# Altium PCB vspyshka.PcbDoc
Units mm, origin at the board's own origin, x right, y up, seen from the top; angles counter-clockwise.
Board outline 53 x 53 mm, 2 copper layers (Top Layer, Bottom Layer), stack 0.891 mm thick; 32 components, 18 nets, 79 pads, 102 vias.
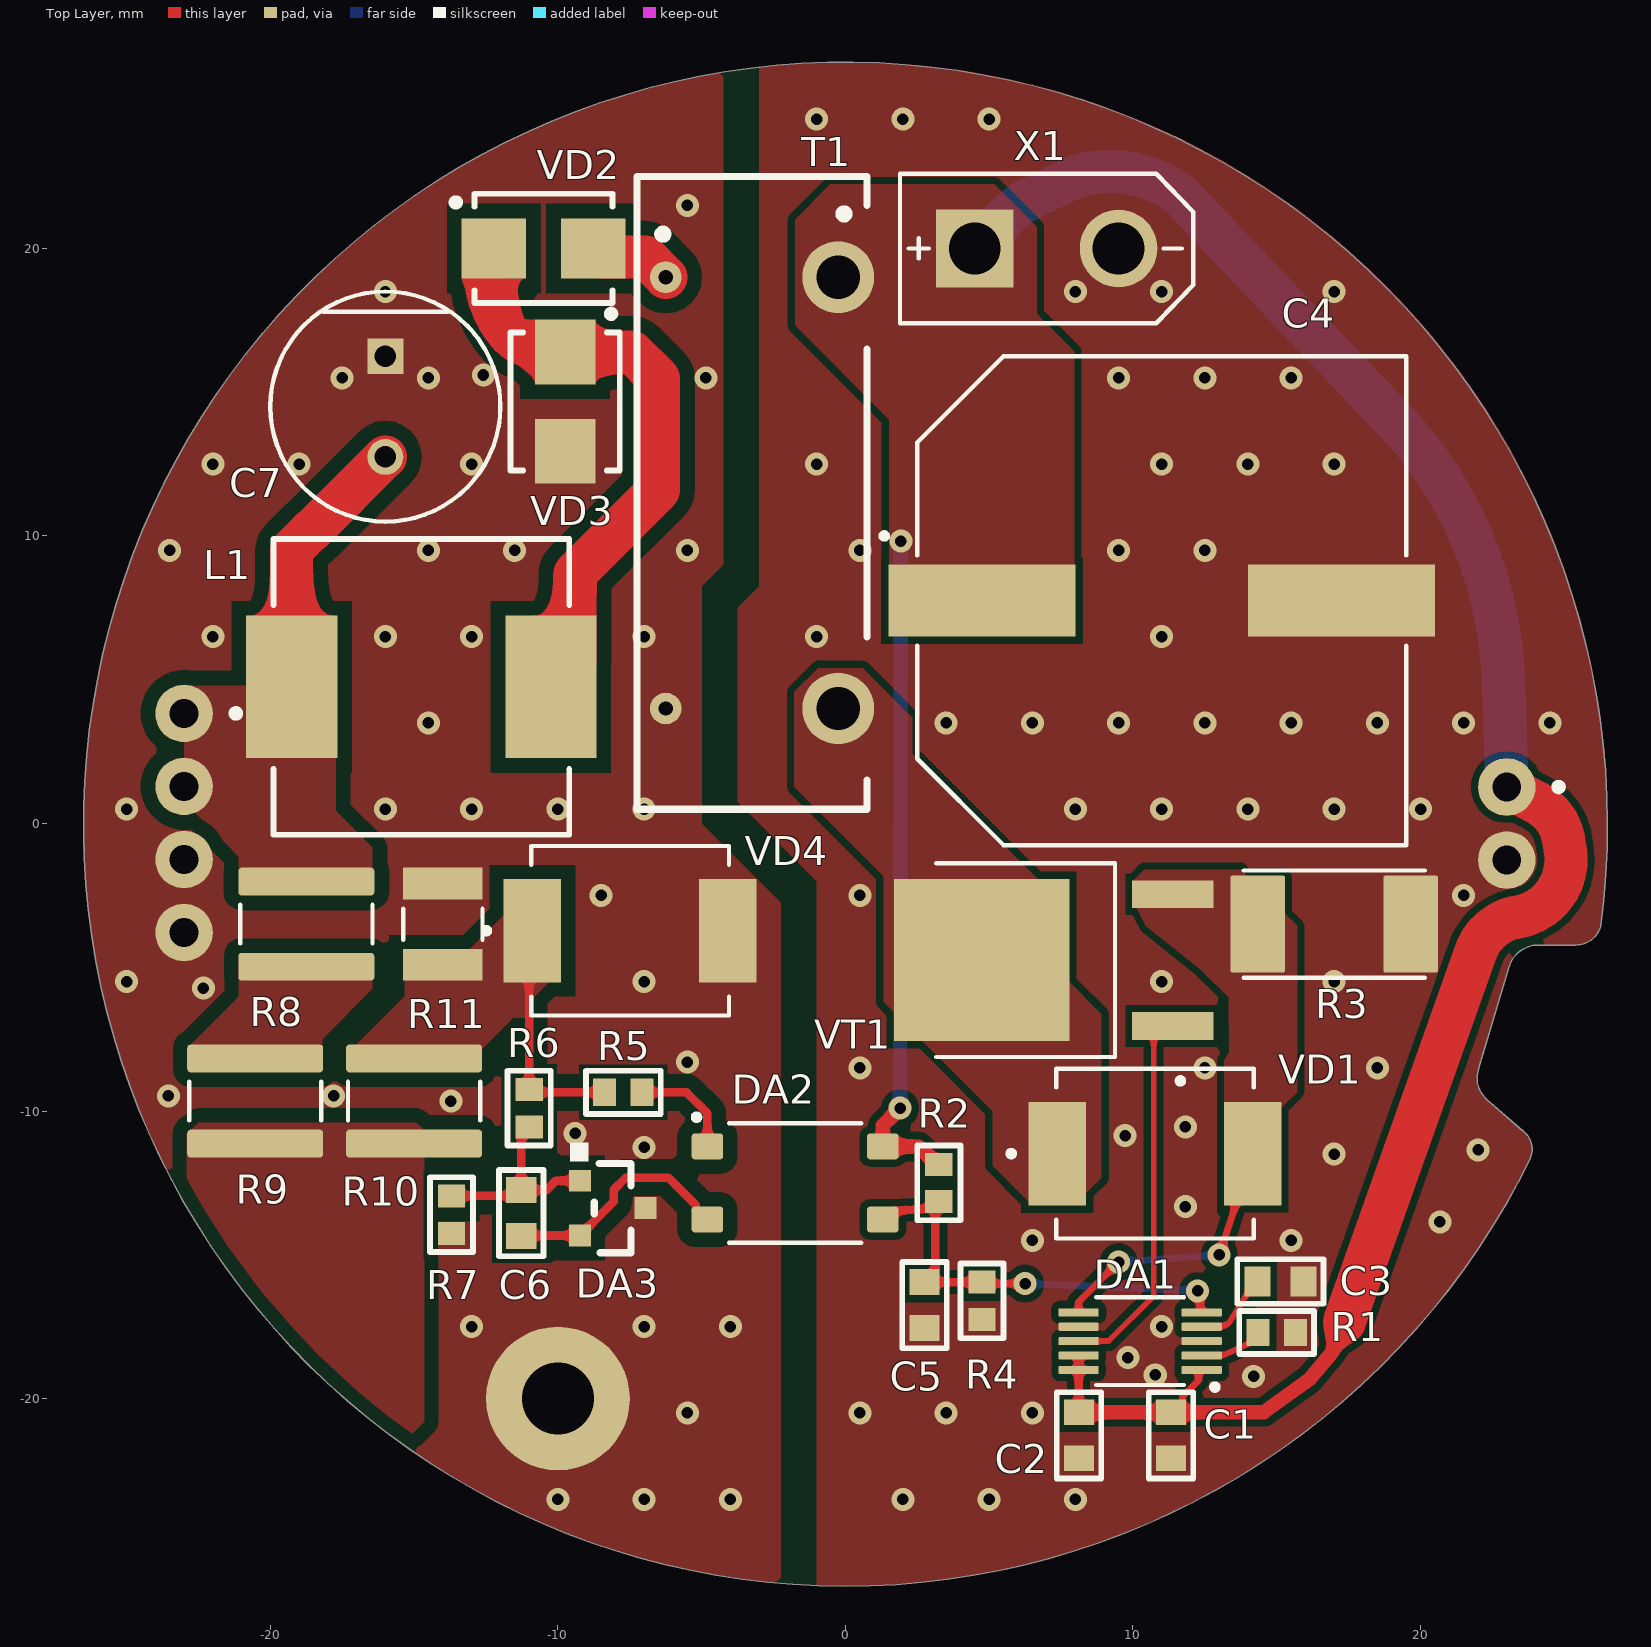
[diagram p0: Top Layer view]
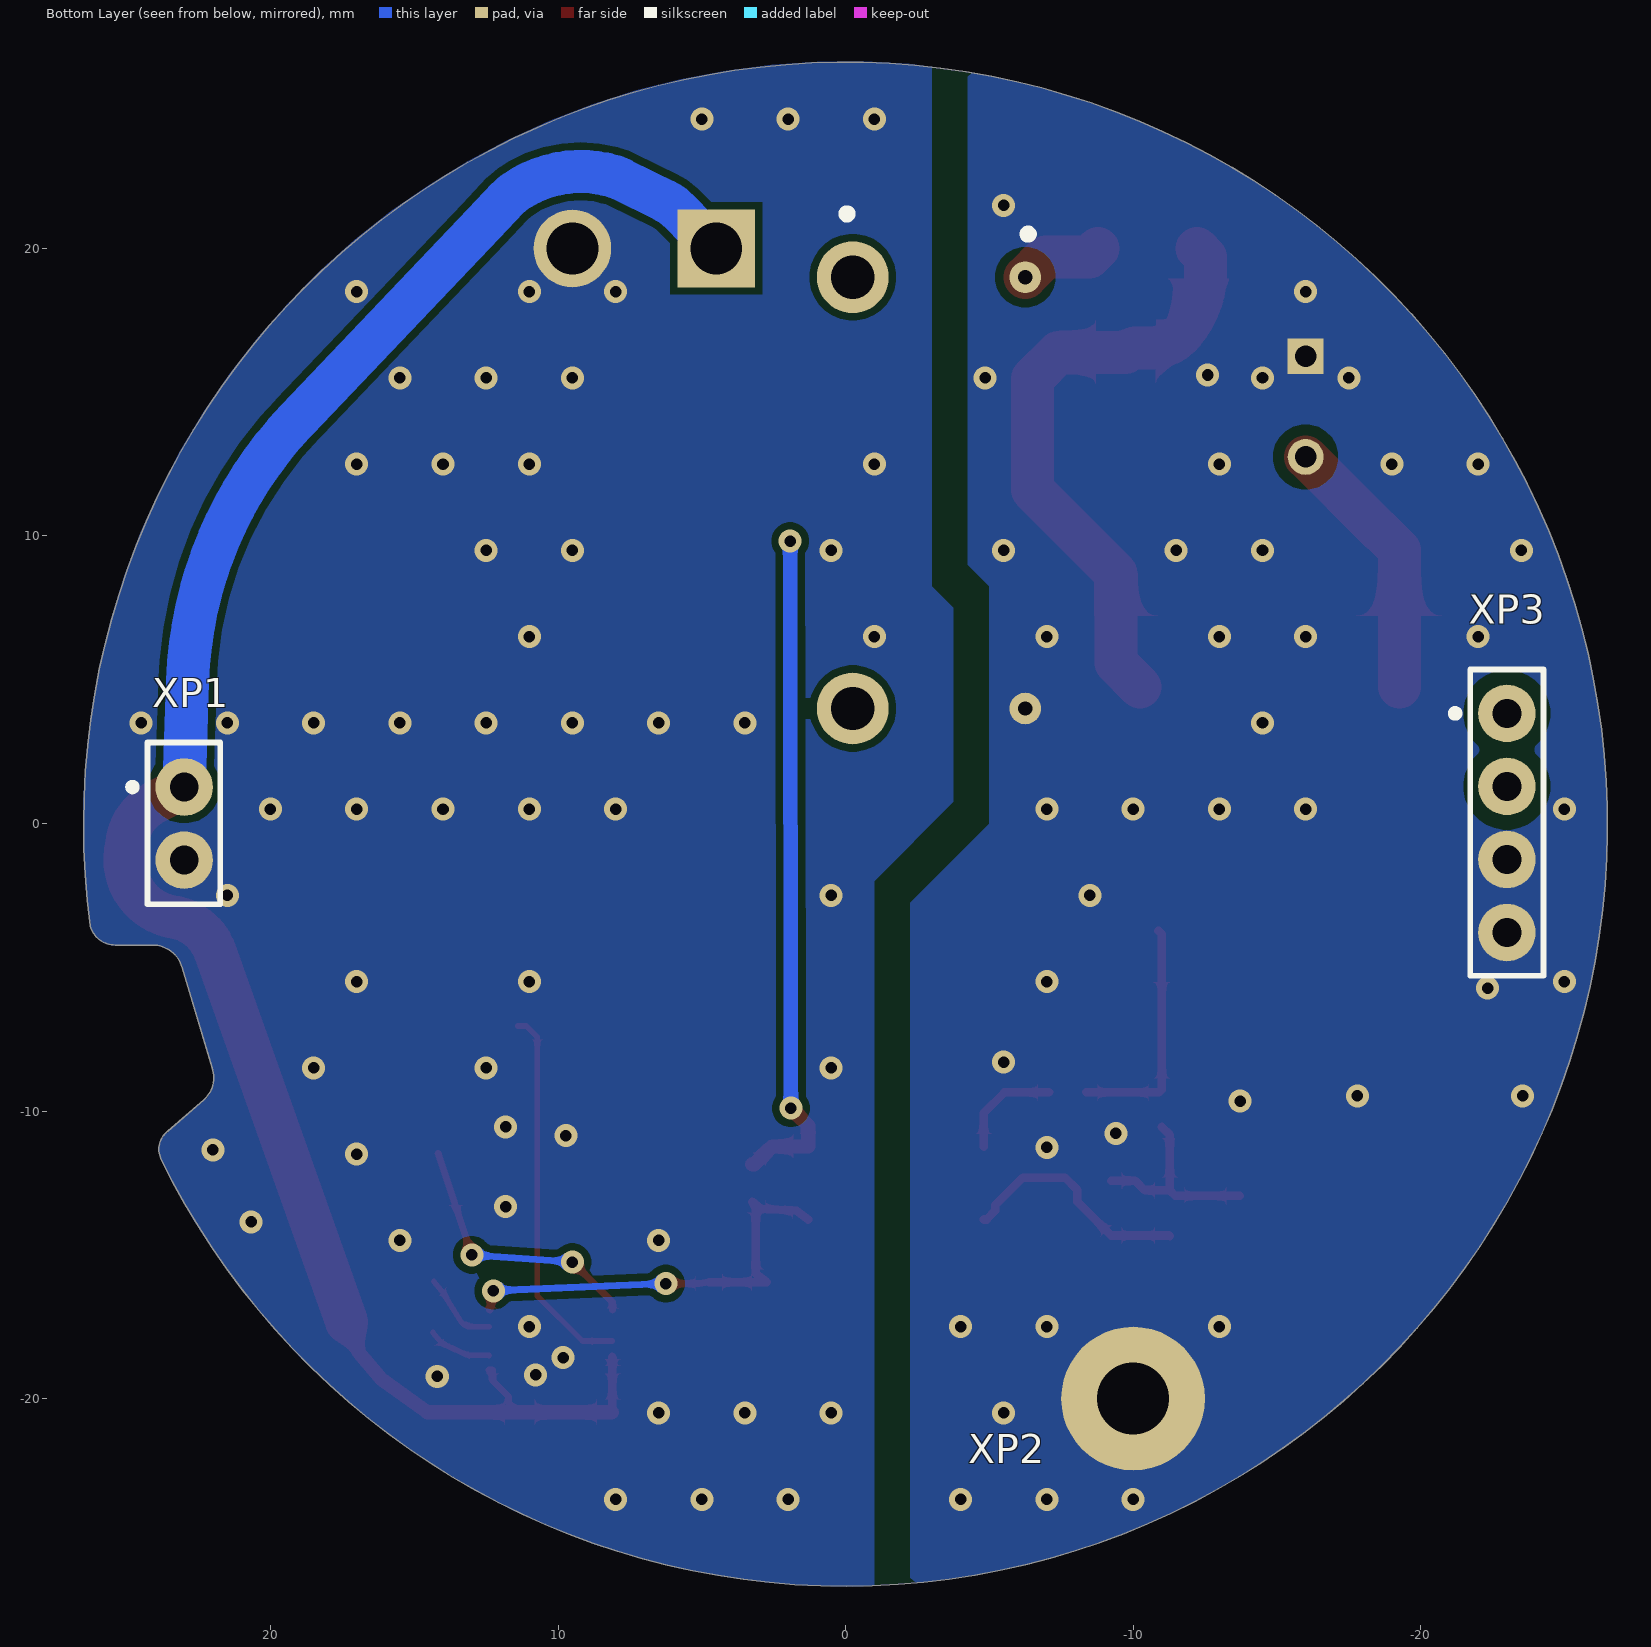
[diagram p1: Bottom Layer view, seen from below]

## Layer stack, top to bottom
Top Solder: solder mask 0.0102, Solder Resist, Dk 3.5
Top Layer: signal copper 0.0356
Dielectric 1: dielectric 0.82, FR-4, Dk 4.8
Bottom Layer: signal copper 0.0356
Bottom Solder: solder mask 0.0102, Solder Resist, Dk 3.5

## Board outline
22.315,-9.604 23.574,-10.702 cw(c23.1,-11.325) 23.814,-11.645 23.817,-11.647 cw(c0.002,-0.025) 26.265,-3.558 26.27,-3.558 cw(c25.4,-3.325) 25.393,-4.226 25.35,-4.225 24.104,-4.227 ccw(c24.096,-5.287) 23.072,-5.013 22.028,-8.504 ccw(c22.967,-8.846)

## Design rules (kind name [scope] priority, off if disabled: settings)
Clearance Clearance_1 [InNetClass('high_voltage')] p1: gap=0.5 ignorepadtopadclearanceinfootprint=FALSE
Clearance [All] p2: gap=0.25 ignorepadtopadclearanceinfootprint=TRUE
HoleSize [All] p1: absolutevalues=TRUE maxlimit=4 minlimit=0.4 maxpercent=80.000 minpercent=20.000
MinimumSolderMaskSliver [All] p1: minsoldermaskwidth=0.15
PolygonConnect [All] p1: connectstyle=Direct reliefconductorwidth=0.254 reliefentries=4 polygonreliefangle="90 Angle" airgapwidth=0.254
RoutingVias [All] p1: holewidth=0.4 width=0.8 viastyle="Through Hole" minholewidth=0.4 minwidth=0.8 maxholewidth=0.8 maxwidth=1.2
SilkToSilkClearance [All] p1: silktosilkclearance=0.05
SilkToSolderMaskClearance [IsPad] p1: minsilkscreentomaskgap=0.01 clearancetoexposedcopper=TRUE
SolderMaskExpansion SolderMaskExpansion_1 [HoleSize=0.4] p1: expansion=0.102 istentingtop=TRUE
SolderMaskExpansion [All] p2: expansion=0.102 istentingtop=FALSE
SupplyNets "Schematic Supply Nets_2" [InNet('GND')] p1: voltage=0.000
SupplyNets "Schematic Supply Nets_3" [InNet('+15')] p2: voltage=0.000
SupplyNets "Schematic Supply Nets_1" [InNet('+300')] p3: voltage=0.000
SupplyNets "Schematic Supply Nets" [InNet('GND_HV')] p4: voltage=0.000
Width [All] p1: maxlimit=1.5 minlimit=0.2 preferedwidth=0.25
26 further rules are at their usual default settings.

## Classes and differential pairs
net class high_voltage: +300 GND_HV NetC6_1 NetC6_2 NetDA2_1 NetL1_1 NetR5_2 NetR8_1 NetR9_1 NetT1_3

## Components (designator, comment, footprint, x,y, rotation, side; value= is the part's Value field where it differs from the comment)
C1 "Capacitor" 0603C 11.325,-21.275 r90 top value="1 мк"
C2 "Capacitor" 0603C 8.125,-21.275 r90 top value="0,1 мк"
C3 "Capacitor" 0603C 15.125,-15.925 r180 top value="0,22 мк"
C4 "Capacitor" CAP_EEVFK1V102M 11,7.75 r0 top value="1000 мк"
C5 "Capacitor" 0603C 2.75,-16.75 r90 top value="68 н"
C6 "Capacitor" 0603C -11.275,-13.55 r90 top value="0,1 мк"
C7 "Capacitor" 8x12_radial -16,14.5 r270 top value="3.3 мк"
DA1 "MAX668" uSOP10 10.25,-18 r180 top
DA2 "LTV354T" SOP4-2_54 -1.75,-12.5 r0 top
DA3 "UMW TL431 0.5%" SOT23-3 -9.236,-12.422 r0 top
L1 "IHLP4040DZER101M11" IHLP-4040 -14.75,4.75 r180 top value="100 мк"
R1 "Resistor" 0603R 15,-17.7 r180 top value="100 к"
R2 "Resistor" 0603R 3.25,-12.5 r90 top value="36 к"
R3 "Resistor" 2512R 17,-3.5 r180 top value="5 м"
R4 "Resistor" 0603R 4.75,-16.6 r90 top value=620
R5 "Resistor" 0603R -7.725,-9.35 r180 top value="18 к"
R6 "Resistor" 0603R -11,-9.9 r270 top value="430 к"
R7 "Resistor" 0603R -13.7,-13.6 r90 top value="39 к"
R8 "Resistor" 1218R -18.75,-3.5 r90 top value="10 к"
R9 "Resistor" 1218R -20.525,-9.65 r90 top value="10 к"
R10 "Resistor" 1218R -15,-9.65 r270 top value="10 к"
R11 "Resistor" 1210R -14,-3.5 r270 top value="3,3 к"
T1 "М20ВН 20х10х5" M20VN -3.25,11.5 r270 top value="1.2 мк"
VD1 "SM15T33A" SMC 10.75,-11.5 r0 top value="30 В"
VD2 "S2M" SMB -10.5,20 r0 top
VD3 "S2M" SMB -9.75,14.675 r270 top
VD4 "SM15T33A" SMC -7.5,-3.75 r0 top value="30 В"
VT1 "50N06" DPAK 7.25,-4.75 r90 top
X1 "XT30UPB-M" XT30UPB-M 7,20 r0 top
XP1 "PBS-2" PBS2_8.5 23,1.27 r180 bottom
XP2 "Spacer m2.5 h16" spacer_m2.5_h16 -10,-20 r90 bottom
XP3 "PBS-4" PBS4_8.5 -23,3.83 r180 bottom

## Footprints (in the part's own frame and the unit in brackets; to place one, negate y for a bottom-side part, rotate by r counter-clockwise, add the part's x,y. Pads: shape width x height; smd on the part's side, far side on the other; paste and mask are expansions set on the pad)
8x12_radial [mm]
  round 1.25 hole 0.75 paste-2539.97 mask+0: 1(1.75,0)
  rect 1.25x1.25 hole 0.75 paste-2539.97 mask+0: 2(-1.75,0)
  silkscreen extent -4,-4 4,4, body extent -4,-4 4,4, height 12
0603C [mm] "Chip Resistor, 2-Leads, Body 1,40x0,80mm, IPC Medium Density"
  rect 0.9x1.05 smd: 1(-0.8,0) 2(0.8,0)
  silkscreen extent -1.5,-0.77 1.5,0.77, body extent -0.85,-0.45 0.85,0.45, height 0.9
0603R [mm] "Chip Resistor, 2-Leads, Body 1.60x0.85mm, IPC Medium Density"
  rect 0.8x0.95 smd: 1(-0.65,0) 2(0.65,0)
  silkscreen extent -1.3,-0.75 1.3,0.75, body extent -0.87,-0.47 0.88,0.48, height 0.9
1210R [mm]
  rect 1.1x2.77 smd: 1(-1.413,0) 2(1.413,0)
  silkscreen extent -0.54,-1.38 0.54,1.38, body extent -1.55,-1.3 1.55,1.3, height 0.65
1218R [mm]
  rrect25% 0.97x4.73 smd: 1(-1.48,0) 2(1.48,0)
  silkscreen extent -0.67,-2.3 0.67,2.3, body extent -1.55,-2.3 1.55,2.3, height 0.67
2512R [mm]
  rrect7% 1.9x3.37 smd: 1(-2.66,0) 2(2.66,0)
  silkscreen extent -3.15,-1.87 3.15,1.87, body extent -3.17,-1.6 3.17,1.6, height 0.65
CAP_EEVFK1V102M [mm]
  rect 6.5x2.5 smd: 1(-6.25,0) 2(6.25,0)
  silkscreen extent -9.75,-8.5 8.5,8.5, body extent -9.2,-8.5 9.2,8.5, height 16.5
DPAK [mm]
  rect 0.97x2.83 smd: 1(-2.29,-4.14) 3(2.29,-4.14)
  rect 5.63x6.09 smd: 2(0,2.51)
  silkscreen extent -4.3,-4.5 3.37,4.09, body extent -3.27,-4.96 3.27,4.96, height 2.39
IHLP-4040 [mil]
  rect 125x195 smd paste+0 mask+0: 1(-177.5,0) 2(177.5,0)
  silkscreen extent -203,-203 203,203, body extent -244,-206 244,206, height 10
M20VN [mm]
  round 2.5 hole 1.5: 1(-7.5,3) 2(7.5,3)
  round 1.1 hole 0.5: 3(-7.5,-3) 4(7.5,-3)
  silkscreen extent -11,-4 11,4, body extent -10,-2.5 10,2.5, height 22
PBS2_8.5 [mm]
  round 2 hole 1: 1(0,0) 2(0,-2.54)
  silkscreen extent -1.92,-4.08 1.25,1.55, body extent -1.25,-4.06 1.25,1.52, height 8.5
PBS4_8.5 [mm]
  round 2 hole 1: 1(0,0) 2(0,-2.54) 3(0,-5.08) 4(0,-7.62)
  silkscreen extent -1.92,-9.13 1.28,1.53, body extent -1.25,-9.14 1.25,1.52, height 8.5
SMB [mm] "Diod"
  rect 2.25x2.1 smd: 1(1.725,0) 2(-1.725,0)
  silkscreen extent -3.17,-1.9 2.4,1.9, body extent -2.57,-1.9 2.57,1.9, height 2.4
SMC [mm]
  rect 2x3.6 smd: 1(3.415,0.021) 2(-3.385,0.021)
  silkscreen extent -5.08,-2.93 3.45,2.97, body extent -3.96,-2.93 3.99,2.97, height 2.65
SOP4-2_54 [mm]
  rrect25% 1.1x0.9 smd: 1(-3.05,1.27) 2(-3.05,-1.27) 3(3.05,-1.27) 4(3.05,1.27)
  silkscreen extent -3.53,-2.07 2.3,2.39, body extent -3.5,-1.92 3.5,1.92, height 2.4
SOT23-3 [mil]
  rect 30x30 smd: 1(0,0) 2(0,-75) 3(90,-37.5)
  silkscreen extent -13,-98 70,52, body extent -4,-97 94,21, height 41
spacer_m2.5_h16 [mm]
  round 5 hole 2.5: 1(0,0)
  body extent -2.89,-2.5 2.89,2.5, height 22
uSOP10 [mm]
  rrect25% 1.4x0.28 smd mask+0.03: 1(-2.14,1) 2(-2.14,0.5) 3(-2.14,0) 4(-2.14,-0.5) 5(-2.14,-1) 6(2.14,-1) 7(2.14,-0.5) 8(2.14,0) 9(2.14,0.5) 10(2.14,1)
  silkscreen extent -2.7,-1.53 1.53,1.7, body extent -2.45,-1.5 2.45,1.5, height 1.1
XT30UPB-M [mm]
  round 2.7 hole 1.8: N(2.5,0)
  rect 2.7x2.7 hole 1.8: P(-2.5,0)
  silkscreen extent -5.1,-2.6 5.1,2.6, body extent -5.1,-2.6 5.1,2.6, height 10.7

## Part data
C1: library part Capacitor_1u_10_50V_X7R_0603C, "Конденсатор", Capacity (nF)=1000, Dielectric=X7R, Tolerance=0,1, Voltage (V)=50, Library Path2=Schematic\Capacitor.SchLib, Part Number=Capacitor_1u_10_50V_X7R_0603C
C2 C6: library part Capacitor_0,1u_10_50V_X7R_0603C, "Конденсатор", Capacity (nF)=100, Dielectric=X7R, Tolerance=0,1, Voltage (V)=50, Library Path2=Schematic\Capacitor.SchLib, Part Number=Capacitor_0,1u_10_50V_X7R_0603C
C3: library part Capacitor_0,22u_10_50V_X7R_0603C, "Конденсатор", Capacity (nF)=220, Dielectric=X7R, Tolerance=0,1, Voltage (V)=50, Library Path2=Schematic\Capacitor.SchLib, Part Number=Capacitor_0,22u_10_50V_X7R_0603C
C4: library part EEVFK1V102M, "Конденсатор алюминиевый электролитический 1000мкФ 25В 20% Low ESR 1100мА SMD12.5x13.5мм", Capacity (uF)=1000, Tolerance=20, Voltage (V)=35, Part Number=EEVFK1V102M, Type="SMD Aluminum"
C5: library part Capacitor_68n_10_50V_X7R_0603C, "Конденсатор", Capacity (nF)=68, Dielectric=X7R, Tolerance=0,1, Voltage (V)=50, Library Path2=Schematic\Capacitor.SchLib, Part Number=Capacitor_68n_10_50V_X7R_0603C
C7: library part JRB2G3R3M03500800120000B, "К50-35, 3.3мкФ, 400В, 105°C, 20%, 8x12мм P:3.5мм", Capacity (uF)=3,3, Tolerance=20, Voltage (V)=400, Part Number=JRB2G3R3M03500800120000B, Type=Aluminum
DA1: "Boost, Flyback, SEPIC преобразователь. 10-uMAX/uSOP", Package="MICROMAX-10 Maxim", Availability="In Stock", Check_prices=https://www.snapeda.com/parts/MAX668EUB+T/Maxim+Integrated/view-part/?ref=eda, MF="Maxim Integrated", MP=MAX668EUB+T, Part Number=MAX668, Price=None, Purchase-URL=https://pricing.snapeda.com/search/part/MAX668EUB+T/?ref=eda, SnapEDA_Link=https://www.snapeda.com/parts/MAX668EUB+T/Maxim+Integrated/view-part/?ref=snap
DA2: "Оптопара с транзисторным выходом, UMW", Check_prices=https://www.snapeda.com/parts/LTV816/Lite-On/view-part/?ref=eda, Part Number=LTV354T, SnapEDA_Link=https://www.snapeda.com/parts/LTV816/Lite-On/view-part/?ref=snap
DA3: "Источник опорного напряжения , программируемый стабилитрон [SOT-23-3]", Part Number="UMW TL431 0.5%"
L1: "ЧИП-индуктивность экранированная 47мкГн ±20% 3,3A 145мОм 4040", Current (A)=3,3, Inductance (μH)=100, Part Number=IHLP4040DZER101M11
R1: library part Resistor_100k_1_0603, "Резистор номиналом 100 кОм и точностью 1%", Tolerance=1%, Part Number=Resistor_100k_1_0603
R2: library part Resistor_36k_1_0603, "Резистор номиналом 36 кОм и точностью 1%", Tolerance=1%, Part Number=Resistor_36k_1_0603
R3: library part CRE2512-FZ-R005E-3, "Резистор номиналом 5 мОм, точностью 1%, 3Вт", Tolerance=1%, Part Number=CRE2512-FZ-R005E-3
R4: library part Resistor_620_1_0603, "Резистор номиналом 620 Ом и точностью 1%", Tolerance=1%, Part Number=Resistor_620_1_0603
R5: library part Resistor_18k_1_0603, "Резистор номиналом 18 кОм и точностью 1%", Tolerance=1%, Part Number=Resistor_18k_1_0603
R6: library part Resistor_430k_1_0603, "Резистор номиналом 430 кОм и точностью 1%", Tolerance=1%, Part Number=Resistor_430k_1_0603
R7: library part Resistor_39k_1_0603, "Резистор номиналом 39 кОм и точностью 1%", Tolerance=1%, Part Number=Resistor_39k_1_0603
R8 R9 R10: library part Resistor_10k_1_0603, "Резистор номиналом 10 кОм и точностью 1%", Tolerance=1%, Part Number=Resistor_10k_1_0603
R11: library part Resistor_3.3k_1_0603, "Резистор номиналом 3,3 кОм и точностью 1%", Tolerance=1%, Part Number=Resistor_3.3k_1_0603
T1: library part M20VN, "Накопительная индуктивность для обратноходового преобразователя, L1=1.2uH, магнитопровод М20ВН, 20х10х5, первичная обмотка d1.3мм", Current (A)=15, Inductance (μH)=1,2, Part Number=M20VN
VD1 VD4: "Защитный диод на 30 В, рассеиваемая мощность 1500 Вт", Power (W)=1500, Voltage nominal (V)=30, Part Number=SM15T33A
VD2 VD3: "Выпрямительный диод на 1000 В, ном. ток 2 А", Current (A)=2, Repetitive peak reverse voltage (Vrrm)=1000, Part Number=S2M
VT1: "N-канальный MOSFET", Part Number=50N06, Напряжение С-И/К-Э="60 В", Ток макс#="50 А"
X1: "2-пиновый разъем с ключом", Value1=12-25.2В, Value2=Общий, Part Number=XT30UPB-M, System=Connector
XP1: "Розетка 4 пина высота 8.5", Value1=+15В, Value2=Общий, Datasheet=https://static.chipdip.ru/lib/986/DOC012986355.pdf, Part Number=PBS-2, System=Connector
XP2: library part spacer_m2.5_h16, "Стойка М2.5, высота 16мм", Value1=GND_HV, Part Number=spacer_m2.5_h16
XP3: "Розетка 4 пина высота 8.5", Value1=+300В, Value3=GND_HV, Datasheet=https://static.chipdip.ru/lib/986/DOC012986355.pdf, Part Number=PBS-4, System=Connector, Value2=+300В, Value4=GND_HV

## Via types
v1: diameter 0.8, hole 0.4, Top Layer to Bottom Layer, tented both sides, 102 vias

## Nets (pads, with @x,y where several pads share a name; then routed paths per layer and width w, separated by ;. In a path a pad name is that pad's centre, name@x,y a point inside that pad or via, vN(x,y) a via of type N, cw(c..) or ccw(c..) an arc to the next point about the centre after c; other vN are vias at no path point)
+15: C1.2 C2.2 C4.1 DA1.1 DA1.9 DA1.10 DA2.4 R2.2 T1.1 X1.P XP1.1 | length 92.9
  Top Layer w0.25: C1.2@11.4,-20.475 11.725,-20.15 11.725,-19.925 12.281,-19.369 12.281,-19.015 DA1.1@12.39,-19.015
  Top Layer w0.3: DA1.9@8.11,-18.543 DA1.10 8.11,-20.46 C2.2
  Top Layer w0.5: v1(1.9,-9.9) 1.3,-10.5 DA2.4 2.555,-11.23 3.175,-11.85 R2.2 ; C2.2 C1.2 11.4,-20.475 11.647,-20.475 14.551,-20.475 14.567,-20.459 16.138,-19.326 16.914,-18.408 17.352,-17.331
  Top Layer w1.5: 17.352,-17.331 21.943,-4.419 cw(c23.355,-4.925) 21.996,-4.29 cw(c23.666,-5.072) 23.033,-3.34 cw(c23.547,-4.749) 23.251,-3.279 23.464,-3.236 ccw(c23.167,-1.765) 23.528,-3.221 ccw(c23.039,-1.259) 25.034,-0.926 24.963,-0.502 ccw(c23.483,-0.749) 24.851,-0.132 ccw(c23.207,-0.874) 24.046,0.722 XP1.1
  Bottom Layer w0.5: v1(1.9,-9.9) v1(1.925,9.825)
  Bottom Layer w1.5: X1.P 5.1,20.6 5.858,21.358 cw(c6.919,20.297) 6.256,21.643 7.808,22.409 cw(c8.469,21.062) 8.019,22.493 cw(c9.215,18.669) 11.52,21.946 cw(c10.655,20.721) 11.742,21.755 12.587,20.867 19.067,14.057 19.07,14.055 cw(c9.03,4.5) 22.882,4.962 22.882,4.958 23,1.405 XP1.1
+300: C7.1 L1.2 R8.2 XP3.1 XP3.2 | length 9.4
  Top Layer w1.5: L1.2 -19.259,9.516 -18.575,10.2 -18.55,10.2 C7.1
GND: C1.1 C2.1 C3.1 C4.2 C5.1 DA1.3 DA1.7 R1.1 R3.1 R4.1 X1.N XP1.2
  other v1: 2,-23.5 5,-23.5 8,-23.5 0.5,-20.5 3.5,-20.5 6.5,-20.5 14.2,-19.225 10.775,-19.175 9.825,-18.575 11,-17.5 6.5,-14.5 15.5,-14.5 20.675,-13.85 11.825,-13.325 17,-11.5 22,-11.35 9.725,-10.85 11.825,-10.55 0.5,-8.5 12.5,-8.5 18.5,-8.5 11,-5.5 17,-5.5 0.5,-2.5 21.5,-2.5 8,0.5 11,0.5 14,0.5 17,0.5 20,0.5 3.5,3.5 6.5,3.5 9.5,3.5 12.5,3.5 15.5,3.5 18.5,3.5 21.5,3.5 24.5,3.5 -1,6.5 11,6.5 0.5,9.5 9.5,9.5 12.5,9.5 -1,12.5 11,12.5 14,12.5 17,12.5 9.5,15.5 12.5,15.5 15.5,15.5 8,18.5 11,18.5 17,18.5 -1,24.5 2,24.5 5,24.5
GND_HV: C7.2 DA3.3 R7.1 R11.1 T1.4 VD3.1 VD4.1 XP2.1 XP3.3 XP3.4
  other v1: -10,-23.5 -7,-23.5 -4,-23.5 -5.5,-20.5 -13,-17.5 -7,-17.5 -4,-17.5 -7,-11.263 -9.4,-10.775 -13.725,-9.65 -23.55,-9.475 -17.8,-9.475 -5.494,-8.3 -22.325,-5.725 -25,-5.5 -7,-5.5 -8.5,-2.5 -25,0.5 -16,0.5 -13,0.5 -10,0.5 -7,0.5 -14.5,3.5 -22,6.5 -16,6.5 -13,6.5 -7,6.5 -23.5,9.5 -14.5,9.5 -11.5,9.5 -5.5,9.5 -22,12.5 -19,12.5 -13,12.5 -17.5,15.5 -14.5,15.5 -4.85,15.5 -12.594,15.599 -16,18.5 -5.5,21.5
NetC3_2: C3.2 DA1.4 | length 2.7
  Top Layer w0.2: DA1.4 12.99,-17.49 13.055,-17.49 ccw(c13.055,-17.105) 13.382,-17.308 13.975,-16.35 C3.2
NetC5_2: C5.2 DA1.5 DA2.3 R2.1 R4.2 | length 15.3
  Top Layer w0.25: R4.2 5.1,-16 v1(6.25,-16) ; v1(12.25,-16.25) DA1.5@12.373,-16.91
  Top Layer w0.3: DA2.3 1.7,-13.47 2.925,-13.4 R2.1 3.125,-13.4 3.125,-15.65 C5.2 R4.2
  Bottom Layer w0.25: v1(6.25,-16) v1(12.25,-16.25)
NetC6_1: C6.1 DA2.2 DA3.2 | length 8.3
  Top Layer w0.3: C6.1 -11.252,-14.327 DA3.2 -8.057,-13.148 -8.057,-12.737 -7.632,-12.313 -6.161,-12.313 -5.2,-13.274 -5.2,-13.47 -4.9,-13.77 DA2.2
NetC6_2: C6.2 DA3.1 R6.2 R7.2 | length 7
  Top Layer w0.3: R7.2 -11.475,-12.95 C6.2 ; R6.2 -11.275,-10.825 C6.2 ; DA3.1 -10.072,-12.422 -10.4,-12.75 C6.2
NetDA1_2: DA1.2 R1.2 | length 2.2
  Top Layer w0.2: DA1.2 12.99,-18.49 13.055,-18.49 ccw(c13.055,-18.105) 13.216,-18.455 14.05,-18.075 R1.2
NetDA1_6: DA1.6 R3.2 VD1.1 VT1.3 | length 9.5
  Top Layer w0.25: DA1.6@8.11,-16.916 8.11,-16.64 v1(9.5,-15.25) ; v1(13,-15) VD1.1
  Bottom Layer w0.25: v1(9.5,-15.25) v1(13,-15)
NetDA1_8: DA1.8 VT1.1 | length 13.1
  Top Layer w0.2: DA1.8 9.15,-18 10.722,-16.428 10.722,-7.425 11.107,-7.04 VT1.1
NetDA2_1: DA2.1 R5.1 | length 3.7
  Top Layer w0.3: R5.1 -5.525,-9.35 -4.8,-10.075 DA2.1
NetL1_1: L1.1 VD2.2 VD3.2 | length 21.3
  Top Layer w1.5: VD2.2 -12.522,19.7 -12.522,19.09 ccw(c-11.022,19.09) -12.518,18.974 ccw(c-9.142,19.242) -11.744,17.075 ccw(c-10.591,18.034) -10.591,16.534 -10.05,16.534 VD3.2@-9.758,16.437 ; L1.1 -9.404,5.587 -9.404,8.696 -6.5,11.6 -6.5,15.475 -7.409,16.384 VD3.2@-9.734,16.384
NetR5_2: R5.2 R6.1 R10.1 R11.2 VD4.2 | length 8.2
  Top Layer w0.3: VD4.2 -11,-3.844 R6.1 -10.9,-9.35 R5.2
NetR8_1: R8.1 R9.2
NetR9_1: R9.1 R10.2
NetT1_2: T1.2 VD1.2 VT1.2
NetT1_3: T1.3 VD2.1 | length 2.9
  Top Layer w1.5: VD2.1 -8.475,19.7 -6.95,19.7 T1.3

## Polygon pours and split planes (outlines as drawn)
GND on Top Layer "GND_L01_P015" (solid, pour order 15): -3,26.305 -3,8.25 -3.75,7.5 -3.75,0.75 -1,-2 -1,-26.506 ccw(c-0.026,0.004) 26.502,0.05 ccw(c0.061,0.042)
GND_HV on Top Layer "GND_HV_L01_P016" (solid, pour order 16): -2.25,-26.429 -2.25,-2.75 -5,0 -5,8.25 -4.25,9 -4.25,26.132 ccw(c0.035,-0.053) -26.498,0 ccw(c0.038,0.008)
+300 on Top Layer "+300_L01_P011" (solid, pour order 11): -23,4.8 -23,0.75 -21.1,-1.15 -21.1,-1.625 -20.85,-1.875 -16.45,-1.875 -16.45,-0.825 -17.725,0.45 -17.725,4.8
NetR8_1 on Top Layer "NETR8_1_L01_P004" (solid, pour order 4): -21.075,-4.575 -21.1,-4.6 -21.1,-6.025 -22.85,-7.775 -22.525,-8.1 -18.2,-8.1 -18.2,-7.5 -16.45,-5.75 -16.45,-4.8
NetR9_1 on Top Layer "NETR9_1_L01_P012" (solid, pour order 12): -22.9,-10.8 -22.9,-12.329 -22.482,-13.08 -22.248,-13.503 -21.982,-13.907 -21.473,-14.693 -21.054,-15.278 -20.6,-15.9 -20.124,-16.486 -19.136,-17.631 -18.35,-18.45 -17.94,-18.846 -16.922,-19.771 -15.988,-20.539 -15.154,-21.151 -15.064,-21.214 -14.65,-20.8 -14.65,-10.675 -14.925,-10.4 -22.5,-10.4
NetR5_2 on Top Layer "NETR5_2_L01_P008" (solid, pour order 8): -14.6,-4.475 -15.325,-5.2 -15.325,-6 -17.225,-7.9 -17.225,-8.325 -13.125,-8.325 -11.55,-6.75 -11.1,-6.75 -11.1,-6.3 -10.125,-5.325 -10.125,-3.05 -11.75,-3.05 -13.175,-4.475
NetT1_2 on Top Layer "NETT1_2_L01_P003" (solid, pour order 3): -0.925,5.425 -1.775,4.575 -1.775,1.275 1.325,-1.825 1.325,-6.2 3.575,-8.45 5.125,-10 5.125,-11.9 6.4,-13.175 8.05,-13.175 8.9,-12.325 8.9,-6.625 7.575,-5.3 7.575,-2.825 2.325,2.425 2.325,3.675 0.595,5.405
NetDA1_6 on Top Layer "NETDA1_6_L01_P002" (solid, pour order 2): 15.712,-9.338 15.2,-9.85 13.175,-9.85 13.175,-8.225 13.35,-7.95 13.325,-6.05 12.338,-5.063 10.465,-3.564 10.025,-2.75 10.025,-1.975 10.4,-1.6 13.75,-1.6 15.712,-3.562
+15 on Top Layer "+15_L01_P000" (solid, pour order 0): 1.525,8.758 1.525,14.05 -1.75,17.325 -1.75,21 -0.525,22.225 5.175,22.225 6.65,20.75 6.65,17.725 7.95,16.425 7.95,7.275 2.5,7.275 1.85,7.925
GND on Bottom Layer "GND_L02_P014" (solid, pour order 14): -3,26.325 -3,8.25 -3.75,7.5 -3.75,0.75 -1,-2 -1,-26.506 ccw(c0.01,-0.033) 26.502,-0.025 ccw(c0.018,0.013)
GND_HV on Bottom Layer "GND_HV_L02_P013" (solid, pour order 13): -2.25,-26.429 -2.25,-2.75 -5,0 -5,8.25 -4.25,9 -4.25,26.132 ccw(c0.035,-0.053) -26.498,0 ccw(c0.038,0.009)

## Other copper
Top Layer:
  pour cut-out: 23.789,-11.646 23.845,-11.512 23.867,-11.265 23.802,-11 23.657,-10.782 22.181,-9.502 22.021,-9.242 21.946,-8.949 21.959,-8.65 23.05,-4.969 23.141,-4.767 23.263,-4.602 23.404,-4.463 23.573,-4.358 23.779,-4.266 24.003,-4.231 24.344,-4.222 25.504,-4.231 25.806,-4.131 26.039,-3.954 26.194,-3.719 26.222,-3.633 26.385,-2.424 26.237,-3.757 25.773,-6.259 24.377,-10.391
Bottom Layer:
  pour cut-out: 23.792,-11.662 23.847,-11.528 23.87,-11.281 23.804,-11.016 23.659,-10.798 22.184,-9.518 22.023,-9.258 21.949,-8.965 21.961,-8.667 23.053,-4.986 23.144,-4.784 23.265,-4.619 23.406,-4.479 23.575,-4.374 23.781,-4.282 24.006,-4.248 24.346,-4.238 25.506,-4.247 25.808,-4.147 26.041,-3.97 26.196,-3.735 26.224,-3.649 26.387,-2.44 26.239,-3.773 25.775,-6.275 24.38,-10.407

## Silkscreen, mask and mechanical layers (free items; w line width, h text height)
Mechanical 4:
  lines w0.254: 23.814,-11.645 ccw(c23.1,-11.325) 23.574,-10.702 22.315,-9.604 cw(c22.967,-8.846) 22.028,-8.504 23.072,-5.013 cw(c24.096,-5.287) 24.104,-4.227 25.35,-4.225 ; 23.817,-11.647 cw(c0.002,-0.025) 26.265,-3.558 ; 25.393,-4.226 ccw(c25.4,-3.325) 26.27,-3.558 ; 19.325,-13.425 19.325,-13.425 ; 19.325,-13.425 19.325,-13.425 ; 19.325,-13.425 19.325,-13.425 ; 19.964,-16.691 19.964,-16.691 ; 19.964,-16.691 19.964,-16.691 ; 19.964,-16.691 19.964,-16.691 ; 19.964,-16.691 19.964,-16.691